# EAGLE board BRUTUS CONTOL BOARD (EAGLE 6.4)
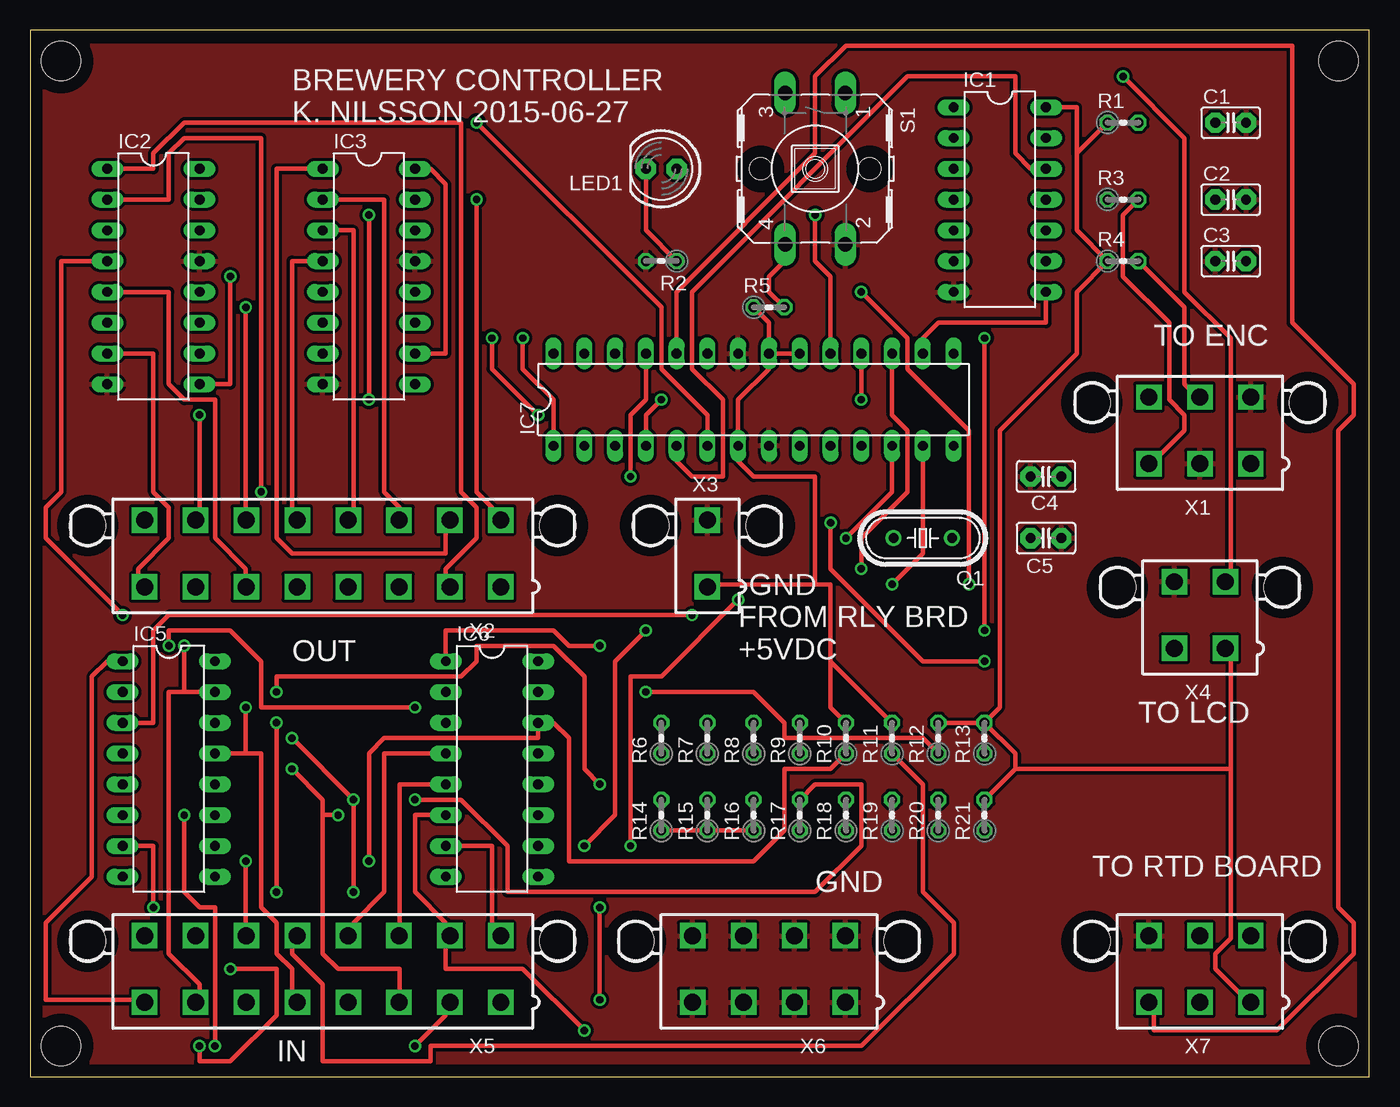
[diagram p0: board, top side]
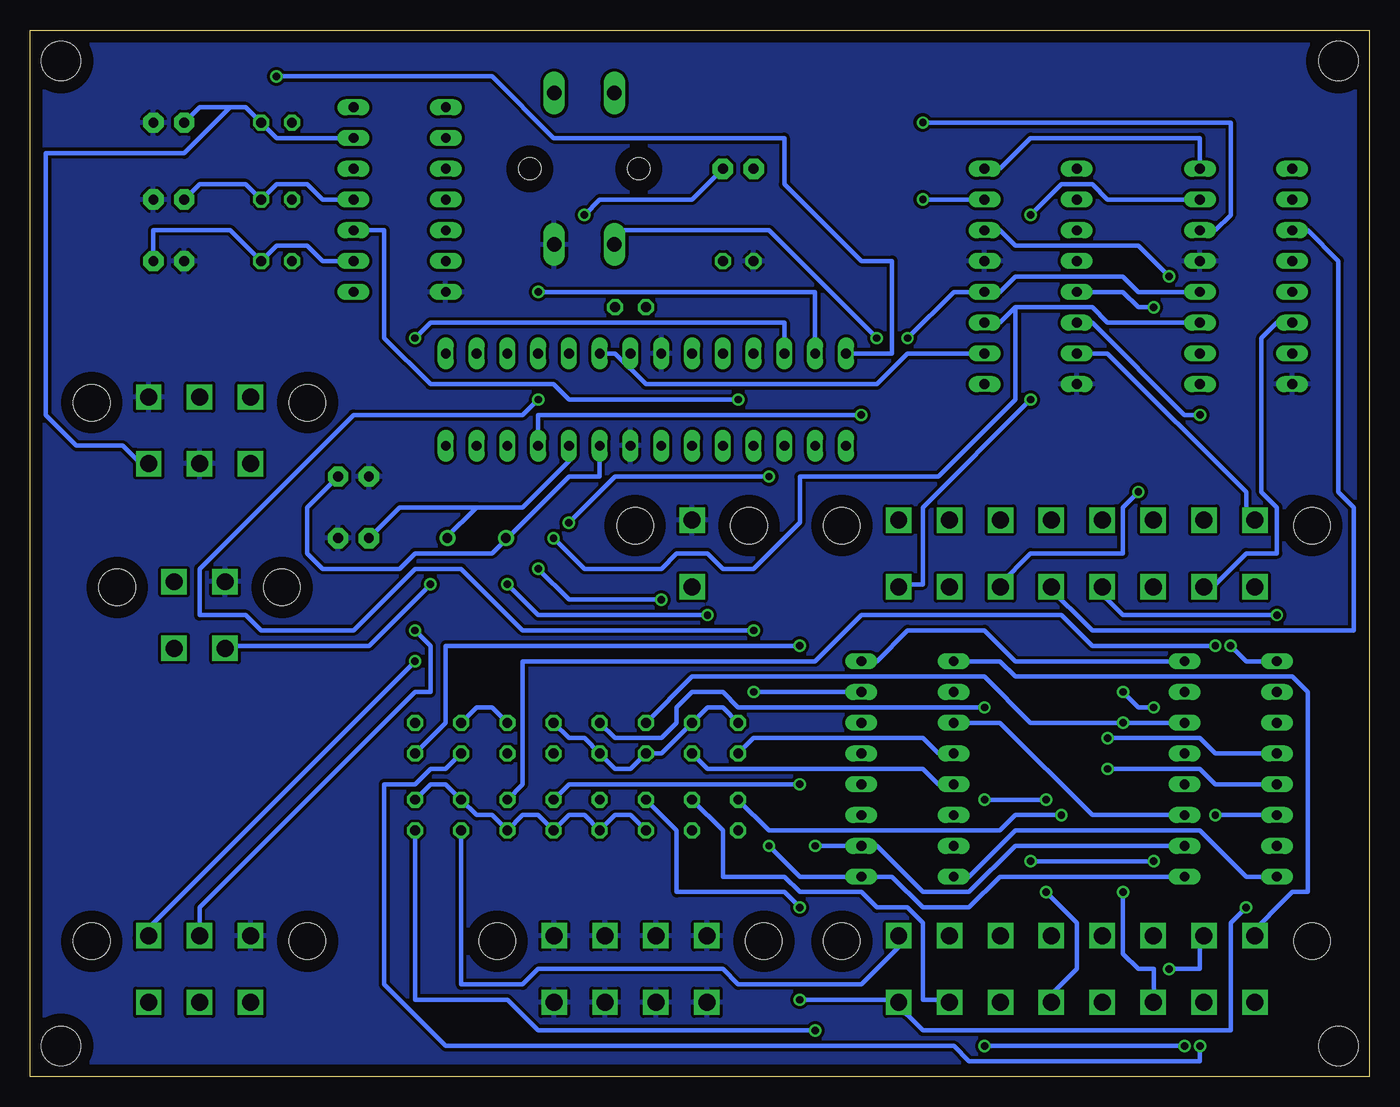
[diagram p1: board, bottom side, seen from below]

Size 110.49 x 86.36 mm. Coordinates in mm from the lower left corner, seen from the top.
Outline: 0,0 110.49,0 110.49,86.36 0,86.35 0,0
Copper layers (1*16): Top 0.035mm / dielectric 1.5mm / Bottom 0.035mm
Design rules "default": minimum track width 10mil, minimum drill 24mil, track to track 8mil, track to pad 8mil, pad to pad 8mil, via to via 8mil, smd to smd 8mil, copper to edge 40mil, drill to drill 8mil, minimum pad ring 10mil, minimum via ring 8mil, stop-mask expansion 4mil, vias tented up to drill 0mil, thermal gap 10mil
Net classes: 0 default: width 0.381 mm, drill 0.001 mm, clearance 0.254 mm
Holes 3.26 mm at 107.95,83.82 2.54,83.82 2.54,2.54 107.95,2.54

## Footprints (pad centres in the part's own frame; a part is rotated, then mirrored left to right if it is on the bottom)
C025-025X050 = drill 0.813 pad 1.676 octagon: 1 -1.27,0; 2 1.27,0
DIL14 = drill 0.813 long: 1 -7.62,-3.81; 2 -5.08,-3.81; 3 -2.54,-3.81; 4 0,-3.81; 5 2.54,-3.81; 6 5.08,-3.81; 7 7.62,-3.81; 8 7.62,3.81; 9 5.08,3.81; 10 2.54,3.81; 11 0,3.81; 12 -2.54,3.81; 13 -5.08,3.81; 14 -7.62,3.81
DIL16 = drill 0.813 long: 1 -8.89,-3.81; 2 -6.35,-3.81; 3 -3.81,-3.81; 4 -1.27,-3.81; 5 1.27,-3.81; 6 3.81,-3.81; 7 6.35,-3.81; 8 8.89,-3.81; 9 8.89,3.81; 10 6.35,3.81; 11 3.81,3.81; 12 1.27,3.81; 13 -1.27,3.81; 14 -3.81,3.81; 15 -6.35,3.81; 16 -8.89,3.81
DIL28-3 = drill 0.813 long: 1 -16.51,-3.81; 2 -13.97,-3.81; 3 -11.43,-3.81; 4 -8.89,-3.81; 5 -6.35,-3.81; 6 -3.81,-3.81; 7 -1.27,-3.81; 8 1.27,-3.81; 9 3.81,-3.81; 10 6.35,-3.81; 11 8.89,-3.81; 12 11.43,-3.81; 13 13.97,-3.81; 14 16.51,-3.81; 15 16.51,3.81; 16 13.97,3.81; 17 11.43,3.81; 18 8.89,3.81; 19 6.35,3.81; 20 3.81,3.81; 21 1.27,3.81; 22 -1.27,3.81; 23 -3.81,3.81; 24 -6.35,3.81; 25 -8.89,3.81; 26 -11.43,3.81; 27 -13.97,3.81; 28 -16.51,3.81
LED5MM = drill 0.813 pad 1.676 octagon: A -1.27,0; K 1.27,0
HC49/S = drill 0.813: 1 -2.413,0; 2 2.413,0
0204V = drill 0.813 octagon: 1 -1.27,0; 2 1.27,0
B3F-40XX = drill 1.194 long: 1 -6.248,2.489; 2 6.248,2.489; 3 -6.248,-2.489; 4 6.248,-2.489 | hole 1.803: 0,-4.496; 0,4.496
5566-6 = drill 1.4 square: 1 4.2,-2.75; 2 0,-2.75; 3 -4.2,-2.75; 4 4.2,2.75; 5 0,2.75; 6 -4.2,2.75 | hole 3: 8.9,2.29; -8.9,2.29
5566-16 = drill 1.4 square: 1 14.7,-2.75; 2 10.5,-2.75; 3 6.3,-2.75; 4 2.1,-2.75; 5 -2.1,-2.75; 6 -6.3,-2.75; 7 -10.5,-2.75; 8 -14.7,-2.75; 9 14.7,2.75; 10 10.5,2.75; 11 6.3,2.75; 12 2.1,2.75; 13 -2.1,2.75; 14 -6.3,2.75; 15 -10.5,2.75; 16 -14.7,2.75 | hole 3: 19.4,2.29; -19.4,2.29
5566-2 = drill 1.4 square: 1 0,-2.75; 2 0,2.75 | hole 3: 4.7,2.29; -4.7,2.29
5566-4 = drill 1.4 square: 1 2.1,-2.75; 2 -2.1,-2.75; 3 2.1,2.75; 4 -2.1,2.75 | hole 3: 6.8,2.29; -6.8,2.29
5566-8 = drill 1.4 square: 1 6.3,-2.75; 2 2.1,-2.75; 3 -2.1,-2.75; 4 -6.3,-2.75; 5 6.3,2.75; 6 2.1,2.75; 7 -2.1,2.75; 8 -6.3,2.75 | hole 3: 11,2.29; -11,2.29

## Placement (x,y rotation side)
C1  10uF  [C025-025X050]  99.06,78.74 0 top
C2  10uF  [C025-025X050]  99.06,72.39 0 top
C3  10uF  [C025-025X050]  99.06,67.31 0 top
C4  22uF  [C025-025X050]  83.82,49.53 180 top
C5  22uF  [C025-025X050]  83.82,44.45 0 top
IC1  74LS14N  [DIL14]  80.01,72.39 270 top
IC2  74LS595N  [DIL16]  10.16,66.04 270 top
IC3  74LS595N  [DIL16]  27.94,66.04 270 top
IC5  4021N  [DIL16]  11.43,25.4 270 top
IC6  4021N  [DIL16]  38.1,25.4 270 top
IC7  [DIL28-3]  59.69,55.88 0 top
LED1  [LED5MM]  52.07,74.93 180 top
Q1  16MHz  [HC49/S]  73.66,44.45 180 top
R1  10k  [0204V]  90.17,78.74 0 top
R2  220  [0204V]  52.07,67.31 180 top
R3  10k  [0204V]  90.17,72.39 0 top
R4  10k  [0204V]  90.17,67.31 0 top
R5  10k  [0204V]  60.96,63.5 0 top
R6  10k  [0204V]  52.07,27.94 90 top
R7  10k  [0204V]  55.88,27.94 90 top
R8  10k  [0204V]  59.69,27.94 90 top
R9  10k  [0204V]  63.5,27.94 90 top
R10  10k  [0204V]  67.31,27.94 90 top
R11  10k  [0204V]  71.12,27.94 90 top
R12  10k  [0204V]  74.93,27.94 90 top
R13  10k  [0204V]  78.74,27.94 90 top
R14  10k  [0204V]  52.07,21.59 90 top
R15  10k  [0204V]  55.88,21.59 90 top
R16  10k  [0204V]  59.69,21.59 90 top
R17  10k  [0204V]  63.5,21.59 90 top
R18  10k  [0204V]  67.31,21.59 90 top
R19  10k  [0204V]  71.12,21.59 90 top
R20  10k  [0204V]  74.93,21.59 90 top
R21  10k  [0204V]  78.74,21.59 90 top
S1  [B3F-40XX]  64.77,74.93 270 top
X1  5566-6  [5566-6]  96.52,53.34 0 top
X2  5566-16  [5566-16]  24.13,43.18 0 top
X3  5566-2  [5566-2]  55.88,43.18 0 top
X4  5566-4  [5566-4]  96.52,38.1 0 top
X5  5566-16  [5566-16]  24.13,8.89 0 top
X6  5566-8  [5566-8]  60.96,8.89 0 top
X7  5566-6  [5566-6]  96.52,8.89 0 top

## Library data of the parts
C1-C5 LED1 R1-R21 = adafruit
IC1-IC3 = 74xx-us
IC5 IC6 = 40xx
IC7 = ic-package
Q1 = adafruit; OC_FARNELL: 1667008; OC_NEWARK: unknown
S1 = adafruit; MF: OMRON COMPONENTS USA; MPN: B3F-4000; OC_FARNELL: 176434; OC_NEWARK: 36K3105
X1 X7 = con-molex; MPN: 95566-61002; OC_FARNELL: unknown; OC_NEWARK: 22K8620
X2 X4-X6 = con-molex; OC_FARNELL: unknown; OC_NEWARK: unknown
X3 = con-molex; OC_FARNELL: 1822072; OC_NEWARK: unknown

## Nets
ANLG1: IC7.24 X7.3
ANLG2: IC7.25 X7.4
ANLG3: IC7.26 X7.5
CLK9: C4.1 IC7.9 Q1.2
CLK10: C5.1 IC7.10 Q1.1
DIGPIN2: IC1.10 IC7.4
DIGPIN3: IC1.12 IC7.5
DIGPIN4: IC2.14 IC7.6
DIGPIN5: IC2.12 IC3.12 IC7.11
DIGPIN6: IC2.11 IC3.11 IC7.12
DIGPIN7: IC5.3 IC7.13
DIGPIN10: IC1.8 IC7.16
DIGPIN11: IC5.9 IC6.9 IC7.17
DIGPIN12: IC5.10 IC6.10 IC7.18
DIGPIN13: IC7.19 LED1.A
GND: C1.2 C2.2 C3.1 C4.2 C5.2 IC1.7 IC2.8 IC2.13 IC3.8 IC3.13 IC7.8 IC7.22 R2.2 S1.2 X1.2 X1.4 X3.2 X4.4 X6.1 X6.2 X6.3 X6.4 X6.5 X6.6 X6.7 X6.8 X7.6
IC8A: C1.1 IC1.13 R1.2 X1.1
IC8B: C2.1 IC1.11 R3.2 X1.3
IC8C: C3.2 IC1.9 R4.2 X1.5
N$6: LED1.K R2.1
N$7: IC2.9 IC3.14
N$17: IC5.11 IC6.3
RESET: IC7.1 R5.2 S1.4
SCL: IC7.28 X4.3
SDA: IC7.27 X4.2
VCC: IC1.14 IC2.16 IC3.10 IC3.16 IC7.7 IC7.20 IC7.21 R1.1 R4.1 R5.1 R6.2 R7.2 R8.1 R9.1 R10.2 R11.2 R12.2 R13.2 R14.1 R15.1 R16.1 R17.1 R18.1 R19.1 R20.2 R21.2 X3.1 X4.1 X7.1
VDD: IC5.16 IC6.16
VSS: IC5.8 IC6.8
X1-1: IC5.7 R16.2 X5.1
X1-2: IC5.6 R15.2 X5.2
X1-3: IC5.5 R14.2 X5.3
X1-4: IC5.4 R17.2 X5.4
X1-5: IC5.13 R18.2 X5.5
X1-6: IC5.14 R8.2 X5.6
X1-7: IC5.15 R19.2 X5.7
X1-8: IC5.1 R9.2 X5.8
X1-9: IC6.7 R20.1 X5.9
X1-10: IC6.6 R21.1 X5.10
X1-11: IC6.5 R7.1 X5.11
X1-12: IC6.4 R6.1 X5.12
X1-13: R11.1 X5.13
X1-14: IC6.14 R10.1 X5.14
X1-15: IC6.15 R12.1 X5.15
X1-16: IC6.1 R13.1 X5.16
X2-1: IC2.15 X2.1
X2-2: IC2.1 X2.2
X2-3: IC2.2 X2.3
X2-4: IC2.3 X2.4
X2-5: IC2.4 X2.5
X2-6: IC2.5 X2.6
X2-7: IC2.6 X2.7
X2-8: IC2.7 X2.8
X2-9: IC3.15 X2.9
X2-10: IC3.1 X2.10
X2-11: IC3.2 X2.11
X2-12: IC3.3 X2.12
X2-13: IC3.4 X2.13
X2-14: IC3.5 X2.14
X2-15: IC3.6 X2.15
X2-16: IC3.7 X2.16

## Tracks (layer width: path | path; a pad name or v marks a point on that pad's centre or on a via)
ANLG1
  Top 0.381: IC7.24 53.34,64.77 64.77,76.2 64.77,82.55 67.31,85.09 104.14,85.09 104.14,62.23 109.22,57.15 109.22,54.61 107.95,53.34 107.95,13.97 109.22,12.7 109.22,10.16 102.87,3.81 92.71,3.81 92.71,6.35 X7.3
ANLG2  (via drill 0.61)
  Top 0.381: IC7.25 50.8,55.88 49.53,54.61 v49.53,49.53 | v66.04,45.72 66.04,41.91 73.66,34.29 v78.74,34.29
  Bottom 0.381: v49.53,49.53 62.23,49.53 v66.04,45.72 | v78.74,34.29 101.6,11.43 X7.4
ANLG3  (via drill 0.61)
  Top 0.381: v78.74,36.83 v78.74,60.96
  Bottom 0.381: IC7.26 48.26,62.23 77.47,62.23 v78.74,60.96 | v78.74,36.83 77.47,35.56 77.47,31.75 78.74,31.75 96.52,13.97 X7.5 96.52,11.43
CLK9
  Bottom 0.381: IC7.9 63.5,49.53 66.04,49.53 71.12,44.45 | C4.1 87.63,46.99 87.63,43.18 86.36,41.91 80.01,41.91 78.74,43.18 72.39,43.18 71.12,44.45 | 71.12,44.45 Q1.2
CLK10
  Bottom 0.381: IC7.10 66.04,50.8 69.85,46.99 73.66,46.99 | 73.66,46.99 76.2,44.45 Q1.1 | C5.1 80.01,46.99 73.66,46.99
DIGPIN2  (via drill 0.61)
  Top 0.381: IC7.4 50.8,54.61 v52.07,55.88
  Bottom 0.381: v52.07,55.88 66.04,55.88 67.31,57.15 77.47,57.15 81.28,60.96 81.28,69.85 IC1.10
DIGPIN3
  Top 0.381: IC7.5 53.34,50.8 54.61,49.53 57.15,49.53 57.15,55.88 54.61,58.42 54.61,64.77 72.39,82.55 81.28,82.55 81.28,76.2 82.55,74.93 IC1.12
DIGPIN4  (via drill 0.61)
  Top 0.381: v36.83,78.74 52.07,63.5 52.07,58.42 55.88,54.61 IC7.6
  Bottom 0.381: IC2.14 12.7,69.85 11.43,71.12 11.43,78.74 v36.83,78.74
DIGPIN5  (via drill 0.61)
  Top 0.381: v41.91,54.61 38.1,58.42 v38.1,60.96
  Bottom 0.381: IC2.12 19.05,64.77 20.32,66.04 29.21,66.04 30.48,64.77 IC3.12 34.29,64.77 v38.1,60.96 | IC7.11 68.58,54.61 v41.91,54.61
DIGPIN6  (via drill 0.61)
  Top 0.381: IC7.12 71.12,48.26 v67.31,44.45
  Bottom 0.381: IC2.11 21.59,62.23 22.86,63.5 29.21,63.5 | 29.21,63.5 30.48,62.23 IC3.11 | v67.31,44.45 64.77,41.91 58.42,41.91 57.15,43.18 54.61,43.18 53.34,41.91 50.8,41.91 46.99,45.72 46.99,49.53 35.56,49.53 29.21,55.88 29.21,63.5
DIGPIN7  (via drill 0.61)
  Top 0.381: IC5.3 10.16,29.21 10.16,36.83 11.43,38.1 v54.61,38.1 | v71.12,40.64 73.66,43.18 IC7.13
  Bottom 0.381: v54.61,38.1 68.58,38.1 v71.12,40.64
DIGPIN10
  Top 0.381: IC7.16 73.66,60.96 74.93,62.23 83.82,62.23 IC1.8
DIGPIN11  (via drill 0.61)
  Top 0.381: IC7.17 71.12,54.61 72.39,53.34 72.39,48.26 68.58,44.45 v68.58,41.91 | v58.42,39.37 52.07,33.02 49.53,33.02 v49.53,19.05
  Bottom 0.381: IC5.9 30.48,16.51 33.02,13.97 36.83,13.97 39.37,16.51 IC6.9 46.99,16.51 v49.53,19.05 | v68.58,41.91 66.04,39.37 v58.42,39.37
DIGPIN12  (via drill 0.61)
  Top 0.381: v68.58,55.88 IC7.18 | v50.8,36.83 48.26,34.29 48.26,21.59 v45.72,19.05
  Bottom 0.381: IC5.10 29.21,19.05 33.02,15.24 36.83,15.24 40.64,19.05 IC6.10 v45.72,19.05 | v68.58,55.88 69.85,54.61 83.82,54.61 96.52,41.91 96.52,38.1 92.71,38.1 91.44,36.83 83.82,36.83 78.74,41.91 74.93,41.91 69.85,36.83 v50.8,36.83
DIGPIN13  (via drill 0.61)
  Top 0.381: IC7.19 66.04,66.04 64.77,67.31 v64.77,71.12
  Bottom 0.381: v64.77,71.12 63.5,72.39 55.88,72.39 LED1.A
GND
  pour Top: -2.54,-1.27 -2.54,85.09 128.27,85.09 128.27,-1.27
  pour Bottom: -1.27,87.63 -1.27,-1.27 113.03,-1.27 113.03,87.63
IC8A
  Bottom 0.381: IC1.13 90.17,77.47 R1.2 92.71,80.01 93.98,80.01 | C1.1 96.52,80.01 93.98,80.01 | 93.98,80.01 97.79,76.2 109.22,76.2 109.22,54.61 106.68,52.07 102.87,52.07 101.6,50.8 X1.1
IC8B
  Top 0.381: R3.2 90.17,71.12 90.17,66.04 93.98,62.23 93.98,55.88 95.25,54.61 95.25,53.34 92.71,50.8 X1.3
  Bottom 0.381: IC1.11 86.36,72.39 87.63,73.66 90.17,73.66 R3.2 92.71,73.66 96.52,73.66 C2.1
IC8C
  Top 0.381: R4.2 95.25,63.5 95.25,57.15 96.52,55.88 X1.5
  Bottom 0.381: IC1.9 86.36,67.31 87.63,68.58 90.17,68.58 R4.2 93.98,69.85 100.33,69.85 C3.2
N$6
  Top 0.381: R2.1 50.8,69.85 LED1.K
N$7  (via drill 0.61)
  Top 0.381: IC2.9 16.51,57.15 v16.51,66.04
  Bottom 0.381: v16.51,66.04 19.05,68.58 29.21,68.58 30.48,69.85 IC3.14
N$17
  Bottom 0.381: IC5.11 22.86,21.59 30.48,29.21 IC6.3
RESET  (via drill 0.61)
  Top 0.381: IC7.1 43.18,55.88 40.64,58.42 v40.64,60.96 | R5.2 60.96,64.77 60.96,66.04 62.23,67.31 62.23,68.58 S1.4
  Bottom 0.381: v40.64,60.96 49.53,69.85 62.23,69.85 S1.4
SCL  (via drill 0.61)
  Top 0.381: v90.17,82.55 95.25,77.47 95.25,64.77 99.06,60.96 99.06,40.64 X4.3
  Bottom 0.381: IC7.28 39.37,59.69 39.37,67.31 41.91,67.31 48.26,73.66 48.26,77.47 67.31,77.47 72.39,82.55 v90.17,82.55
SDA  (via drill 0.61)
  Top 0.381: v68.58,64.77 72.39,60.96 72.39,58.42 77.47,53.34 v77.47,40.64
  Bottom 0.381: IC7.27 45.72,64.77 v68.58,64.77 | v77.47,40.64 82.55,35.56 93.98,35.56 X4.2
VCC
  Top 0.381: 99.06,25.4 99.06,35.56 X4.1 | 99.06,25.4 99.06,11.43 97.79,10.16 97.79,8.89 100.33,6.35 X7.1 | IC3.10 34.29,59.69 34.29,73.66 33.02,74.93 IC3.16 | R14.1 R15.1 R16.1 | 86.36,76.2 86.36,69.85 R4.1 86.36,64.77 86.36,59.69 80.01,53.34 80.01,30.48 R13.2 | R1.1 86.36,76.2 | IC1.14 86.36,80.01 86.36,76.2 | IC7.21 60.96,58.42 58.42,55.88 IC7.7 58.42,50.8 59.69,49.53 64.77,49.53 64.77,40.64 | R5.1 60.96,62.23 IC7.21 | IC7.21 IC7.20 | R12.2 R13.2 | 64.77,40.64 66.04,40.64 66.04,34.29 | 64.77,40.64 55.88,40.64 X3.1 | 66.04,34.29 66.04,30.48 R10.2 | 66.04,34.29 R11.2 | 81.28,25.4 R21.2 | 81.28,25.4 81.28,26.67 R13.2 | 81.28,25.4 99.06,25.4
  Bottom 0.381: IC2.16 13.97,77.47 27.94,77.47 30.48,74.93 IC3.16 | R16.1 60.96,21.59 62.23,21.59 R17.1 64.77,21.59 66.04,21.59 R18.1 68.58,21.59 69.85,21.59 R19.1 72.39,21.59 73.66,21.59 R20.2 76.2,24.13 77.47,24.13 R21.2 | R11.2 72.39,30.48 73.66,30.48 R12.2 | R6.2 53.34,30.48 54.61,30.48 R7.2 58.42,26.67 R8.1 60.96,25.4 62.23,25.4 R9.1 64.77,27.94 66.04,27.94 R10.2 | IC3.10 38.1,59.69 40.64,57.15 59.69,57.15 62.23,59.69 IC7.20
VDD
  Bottom 0.381: IC5.16 29.21,34.29 31.75,36.83 38.1,36.83 40.64,34.29 IC6.16
VSS
  Bottom 0.381: IC5.8 10.16,16.51 13.97,20.32 29.21,20.32 33.02,16.51 IC6.8
X1-1  (via drill 0.61)
  Top 0.381: IC5.7 10.16,19.05 v10.16,13.97 | v46.99,6.35 v46.99,13.97
  Bottom 0.381: v10.16,13.97 11.43,12.7 11.43,3.81 36.83,3.81 39.37,6.35 | R16.2 57.15,20.32 57.15,15.24 48.26,15.24 v46.99,13.97 | 39.37,6.35 v46.99,6.35 | 39.37,6.35 X5.1
X1-2  (via drill 0.61)
  Top 0.381: v12.7,21.59 12.7,15.24 13.97,13.97 15.24,13.97 v15.24,2.54 | v31.75,2.54 34.29,5.08 34.29,6.35 X5.2
  Bottom 0.381: v12.7,21.59 IC5.6 | v31.75,2.54 v15.24,2.54 | R15.2 53.34,20.32 53.34,16.51 48.26,16.51 46.99,15.24 41.91,15.24 40.64,13.97 38.1,13.97 36.83,12.7 36.83,6.35 35.56,6.35 X5.2
X1-3  (via drill 0.61)
  Top 0.381: v21.59,25.4 24.13,22.86 24.13,21.59 | 24.13,21.59 24.13,10.16 25.4,8.89 30.48,8.89 30.48,6.35 X5.3 | 24.13,21.59 v25.4,21.59
  Bottom 0.381: IC5.5 12.7,24.13 13.97,25.4 v21.59,25.4 | R14.2 49.53,20.32 30.48,20.32 29.21,21.59 v25.4,21.59
X1-4  (via drill 0.61)
  Top 0.381: v21.59,27.94 v26.67,22.86 v26.67,15.24 | R17.2 64.77,24.13 68.58,24.13 68.58,19.05 64.77,15.24 39.37,15.24 39.37,19.05 35.56,22.86 v31.75,22.86
  Bottom 0.381: IC5.4 12.7,26.67 13.97,27.94 v21.59,27.94 | v26.67,15.24 24.13,12.7 24.13,8.89 26.67,6.35 X5.4 | v26.67,22.86 v31.75,22.86
X1-5  (via drill 0.61)
  Top 0.381: 17.78,26.67 19.05,26.67 19.05,13.97 20.32,12.7 20.32,10.16 21.59,8.89 21.59,6.35 X5.5 | 17.78,26.67 IC5.13 | v46.99,24.13 45.72,25.4 45.72,33.02 43.18,35.56 36.83,35.56 36.83,34.29 35.56,33.02 20.32,33.02 v20.32,31.75 | 17.78,26.67 v17.78,30.48
  Bottom 0.381: R18.2 66.04,24.13 v46.99,24.13 | v20.32,31.75 19.05,30.48 v17.78,30.48
X1-6  (via drill 0.61)
  Top 0.381: v20.32,29.21 v20.32,15.24
  Bottom 0.381: IC5.14 v20.32,29.21 27.94,29.21 31.75,33.02 55.88,33.02 R8.2 | v20.32,15.24 20.32,10.16 19.05,8.89 17.78,8.89 17.78,6.35 X5.6
X1-7  (via drill 0.61)
  Top 0.381: 12.7,31.75 11.43,31.75 11.43,10.16 13.97,7.62 13.97,6.35 X5.7 | 12.7,31.75 IC5.15 | 12.7,31.75 v12.7,35.56
  Bottom 0.381: R19.2 69.85,24.13 69.85,34.29 45.72,34.29 41.91,38.1 25.4,38.1 22.86,35.56 v12.7,35.56
X1-8  (via drill 0.61)
  Top 0.381: v31.75,30.48 19.05,30.48 19.05,34.29 16.51,36.83 11.43,36.83 v11.43,35.56 | IC5.1 6.35,34.29 5.08,33.02 5.08,16.51 1.27,12.7 1.27,6.35 8.89,6.35 X5.8
  Bottom 0.381: R9.2 62.23,27.94 58.42,27.94 57.15,29.21 57.15,30.48 55.88,31.75 53.34,31.75 52.07,30.48 v31.75,30.48 | v11.43,35.56 10.16,34.29 IC5.1
X1-9
  Top 0.381: IC6.7 38.1,19.05 38.1,11.43 X5.9
  Bottom 0.381: R20.1 74.93,7.62 69.85,7.62 68.58,8.89 53.34,8.89 52.07,7.62 41.91,7.62 38.1,11.43 X5.9
X1-10  (via drill 0.61)
  Top 0.381: v45.72,3.81 40.64,8.89 34.29,8.89 34.29,11.43 | IC6.6 31.75,21.59 31.75,15.24 34.29,12.7 34.29,11.43 | 34.29,11.43 X5.10
  Bottom 0.381: R21.1 78.74,6.35 71.12,6.35 68.58,3.81 v45.72,3.81
X1-11
  Top 0.381: IC6.5 30.48,24.13 30.48,11.43 X5.11
  Bottom 0.381: R7.1 54.61,25.4 36.83,25.4 35.56,24.13 IC6.5
X1-12
  Top 0.381: IC6.4 29.21,26.67 29.21,15.24 26.67,12.7 26.67,11.43 X5.12
  Bottom 0.381: R6.1 50.8,27.94 36.83,27.94 35.56,26.67 IC6.4
X1-13
  Top 0.381: R11.1 73.66,24.13 73.66,15.24 76.2,12.7 76.2,10.16 68.58,2.54 33.02,2.54 33.02,1.27 24.13,1.27 24.13,7.62 21.59,10.16 21.59,11.43 X5.13
X1-14  (via drill 0.61)
  Top 0.381: R10.1 66.04,25.4 62.23,25.4 62.23,20.32 59.69,17.78 44.45,17.78 44.45,27.94 43.18,29.21 IC6.14 41.91,27.94 29.21,27.94 27.94,26.67 v27.94,17.78 | v17.78,17.78 17.78,11.43 X5.14
  Bottom 0.381: v27.94,17.78 v17.78,17.78
X1-15  (via drill 0.61)
  Top 0.381: R12.1 73.66,27.94 62.23,27.94 62.23,29.21 59.69,31.75 v50.8,31.75 | v16.51,8.89 20.32,8.89 20.32,5.08 16.51,1.27 13.97,1.27 v13.97,2.54
  Bottom 0.381: IC6.15 v50.8,31.75 | v16.51,8.89 13.97,8.89 13.97,11.43 X5.15 | v13.97,2.54 13.97,1.27 33.02,1.27 34.29,2.54 76.2,2.54 81.28,7.62 81.28,24.13 78.74,24.13 77.47,25.4 76.2,25.4 R12.1
X1-16  (via drill 0.61)
  Top 0.381: v46.99,35.56 44.45,35.56 43.18,36.83 34.29,36.83 IC6.1
  Bottom 0.381: IC6.1 30.48,34.29 29.21,33.02 6.35,33.02 5.08,31.75 5.08,15.24 6.35,15.24 10.16,11.43 X5.16 | R13.1 76.2,29.21 76.2,35.56 v46.99,35.56
X2-1  (via drill 0.61)
  Top 0.381: v27.94,55.88 v27.94,71.12
  Bottom 0.381: IC2.15 21.59,72.39 22.86,73.66 25.4,73.66 v27.94,71.12 | v27.94,55.88 36.83,46.99 36.83,40.64 38.1,40.64 X2.1
X2-2
  Top 0.381: IC2.1 10.16,74.93 10.16,76.2 12.7,78.74 35.56,78.74 35.56,48.26 36.83,46.99 36.83,44.45 34.29,41.91 34.29,40.64 X2.2
X2-3  (via drill 0.61)
  Top 0.381: IC2.2 11.43,72.39 11.43,76.2 12.7,77.47 19.05,77.47 v19.05,48.26
  Bottom 0.381: v19.05,48.26 20.32,46.99 20.32,43.18 27.94,43.18 30.48,40.64 X2.3
X2-4
  Bottom 0.381: IC2.3 5.08,69.85 2.54,67.31 2.54,48.26 1.27,46.99 1.27,36.83 22.86,36.83 26.67,40.64 X2.4
X2-5  (via drill 0.61)
  Top 0.381: IC2.4 2.54,67.31 2.54,48.26 1.27,46.99 1.27,44.45 v7.62,38.1
  Bottom 0.381: v7.62,38.1 20.32,38.1 22.86,40.64 X2.5
X2-6
  Top 0.381: IC2.5 11.43,64.77 11.43,57.15 12.7,55.88 15.24,55.88 15.24,44.45 17.78,41.91 17.78,40.64 X2.6
X2-7
  Bottom 0.381: IC2.6 7.62,62.23 8.89,60.96 8.89,48.26 7.62,46.99 7.62,43.18 10.16,43.18 12.7,40.64 X2.7
X2-8
  Top 0.381: IC2.7 10.16,59.69 10.16,48.26 11.43,46.99 11.43,44.45 8.89,41.91 8.89,40.64 X2.8
X2-9  (via drill 0.61)
  Top 0.381: v36.83,72.39 36.83,48.26 38.1,46.99 38.1,45.72 X2.9
  Bottom 0.381: v36.83,72.39 IC3.15
X2-10
  Top 0.381: IC3.1 20.32,74.93 20.32,44.45 21.59,43.18 34.29,43.18 34.29,45.72 X2.10
X2-11
  Top 0.381: IC3.2 29.21,72.39 29.21,48.26 30.48,46.99 30.48,45.72 X2.11
X2-12
  Top 0.381: IC3.3 26.67,69.85 26.67,45.72 X2.12
X2-13
  Top 0.381: IC3.4 21.59,67.31 21.59,45.72 X2.13
X2-14  (via drill 0.61)
  Top 0.381: v17.78,63.5 17.78,45.72 X2.14
  Bottom 0.381: IC3.5 20.32,64.77 19.05,63.5 v17.78,63.5
X2-15  (via drill 0.61)
  Top 0.381: v13.97,54.61 13.97,45.72 X2.15
  Bottom 0.381: IC3.6 22.86,62.23 15.24,54.61 v13.97,54.61
X2-16
  Bottom 0.381: IC3.7 21.59,59.69 10.16,48.26 10.16,45.72 X2.16

## Text on the board
tSilk: BREWERY CONTROLLER / K. NILSSON 2015-06-27 | TO ENC | OUT | -GND / FROM RLY BRD / +5VDC | TO LCD | TO RTD BOARD | GND | IN